# Altium PCB Beetech Metro Shield 1.2.PcbDoc
Units mm, origin at the board's own origin, x right, y up, seen from the top; angles counter-clockwise.
Board outline 68 x 53.53 mm, 2 copper layers (Top Layer, Bottom Layer), stack 1.671 mm thick; 26 components, 22 nets, 116 pads, 21 vias.
Unrouted connection lines stored in the file: 80.
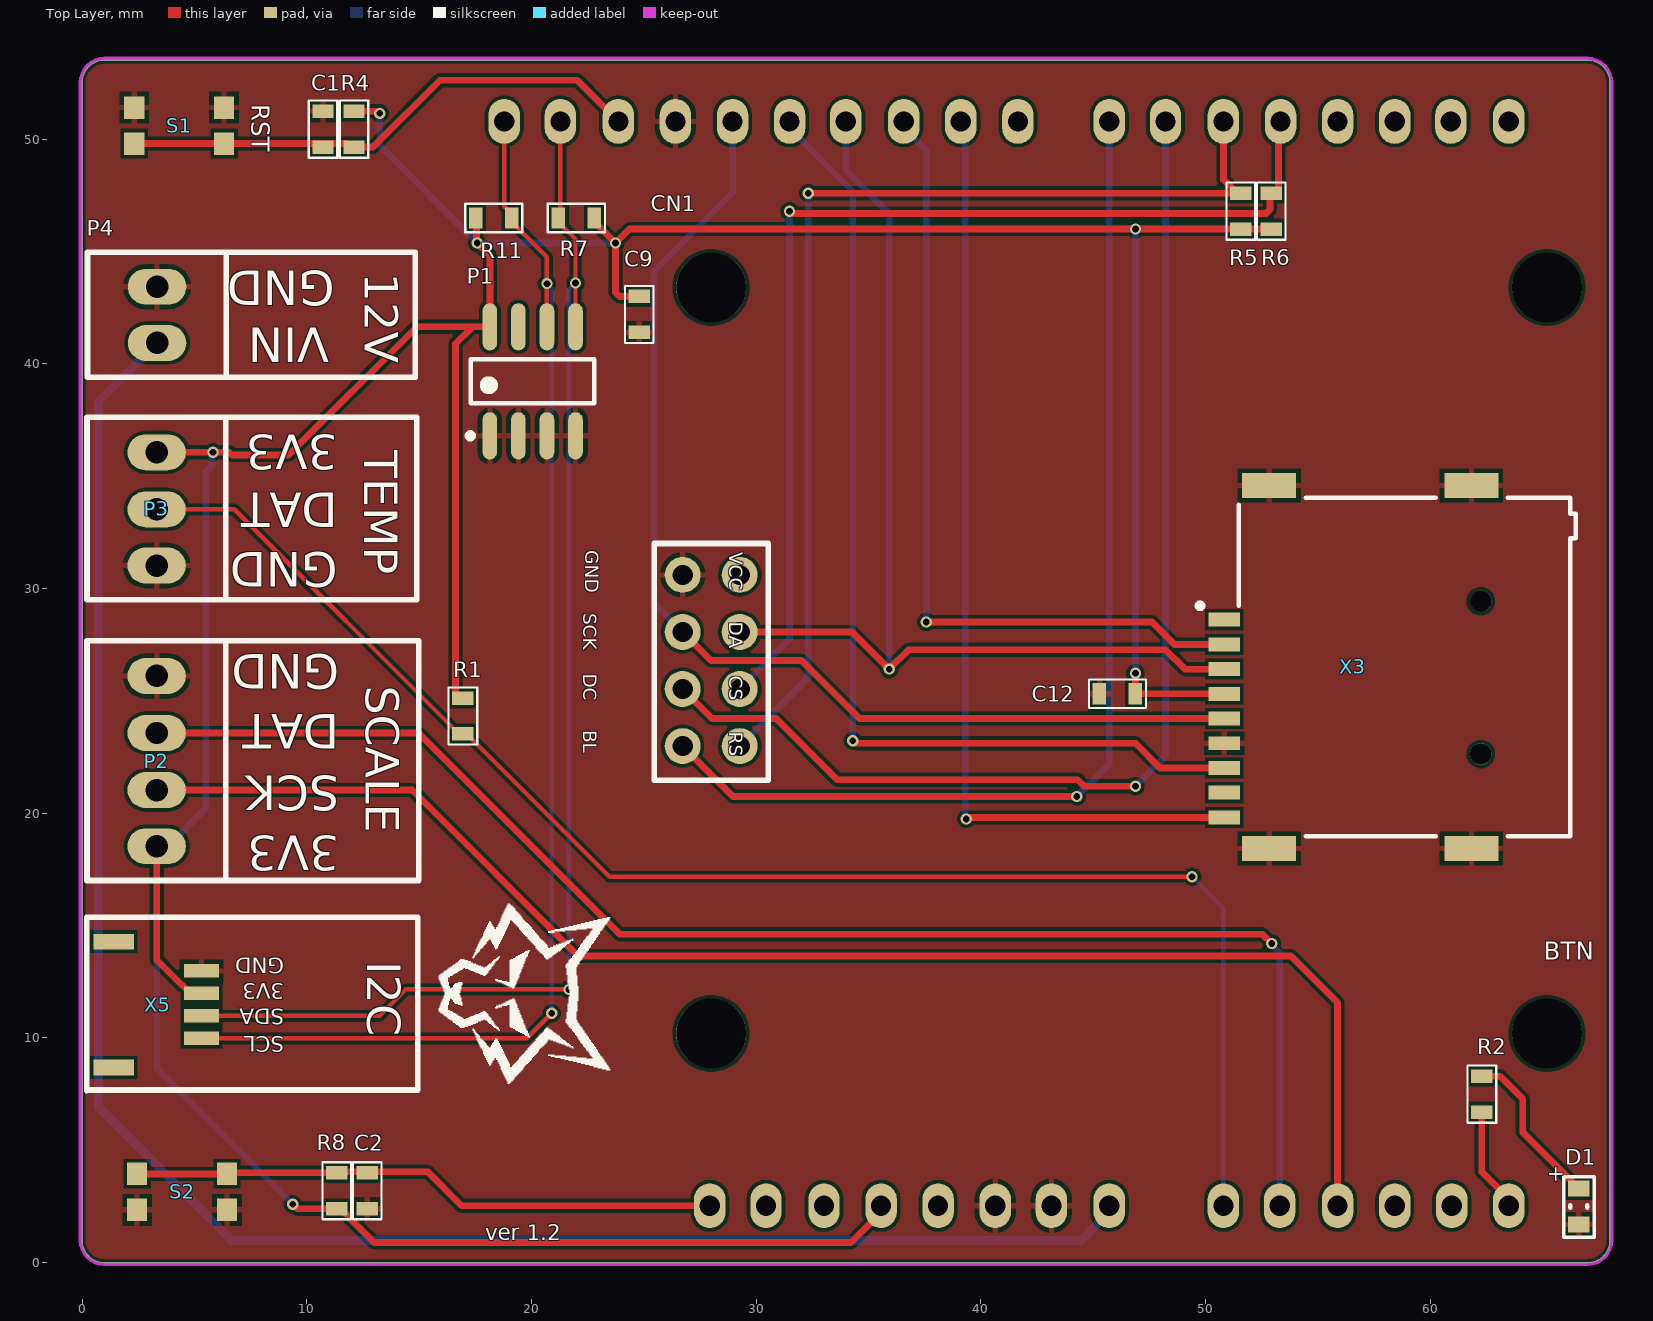
[diagram p0: Top Layer view]
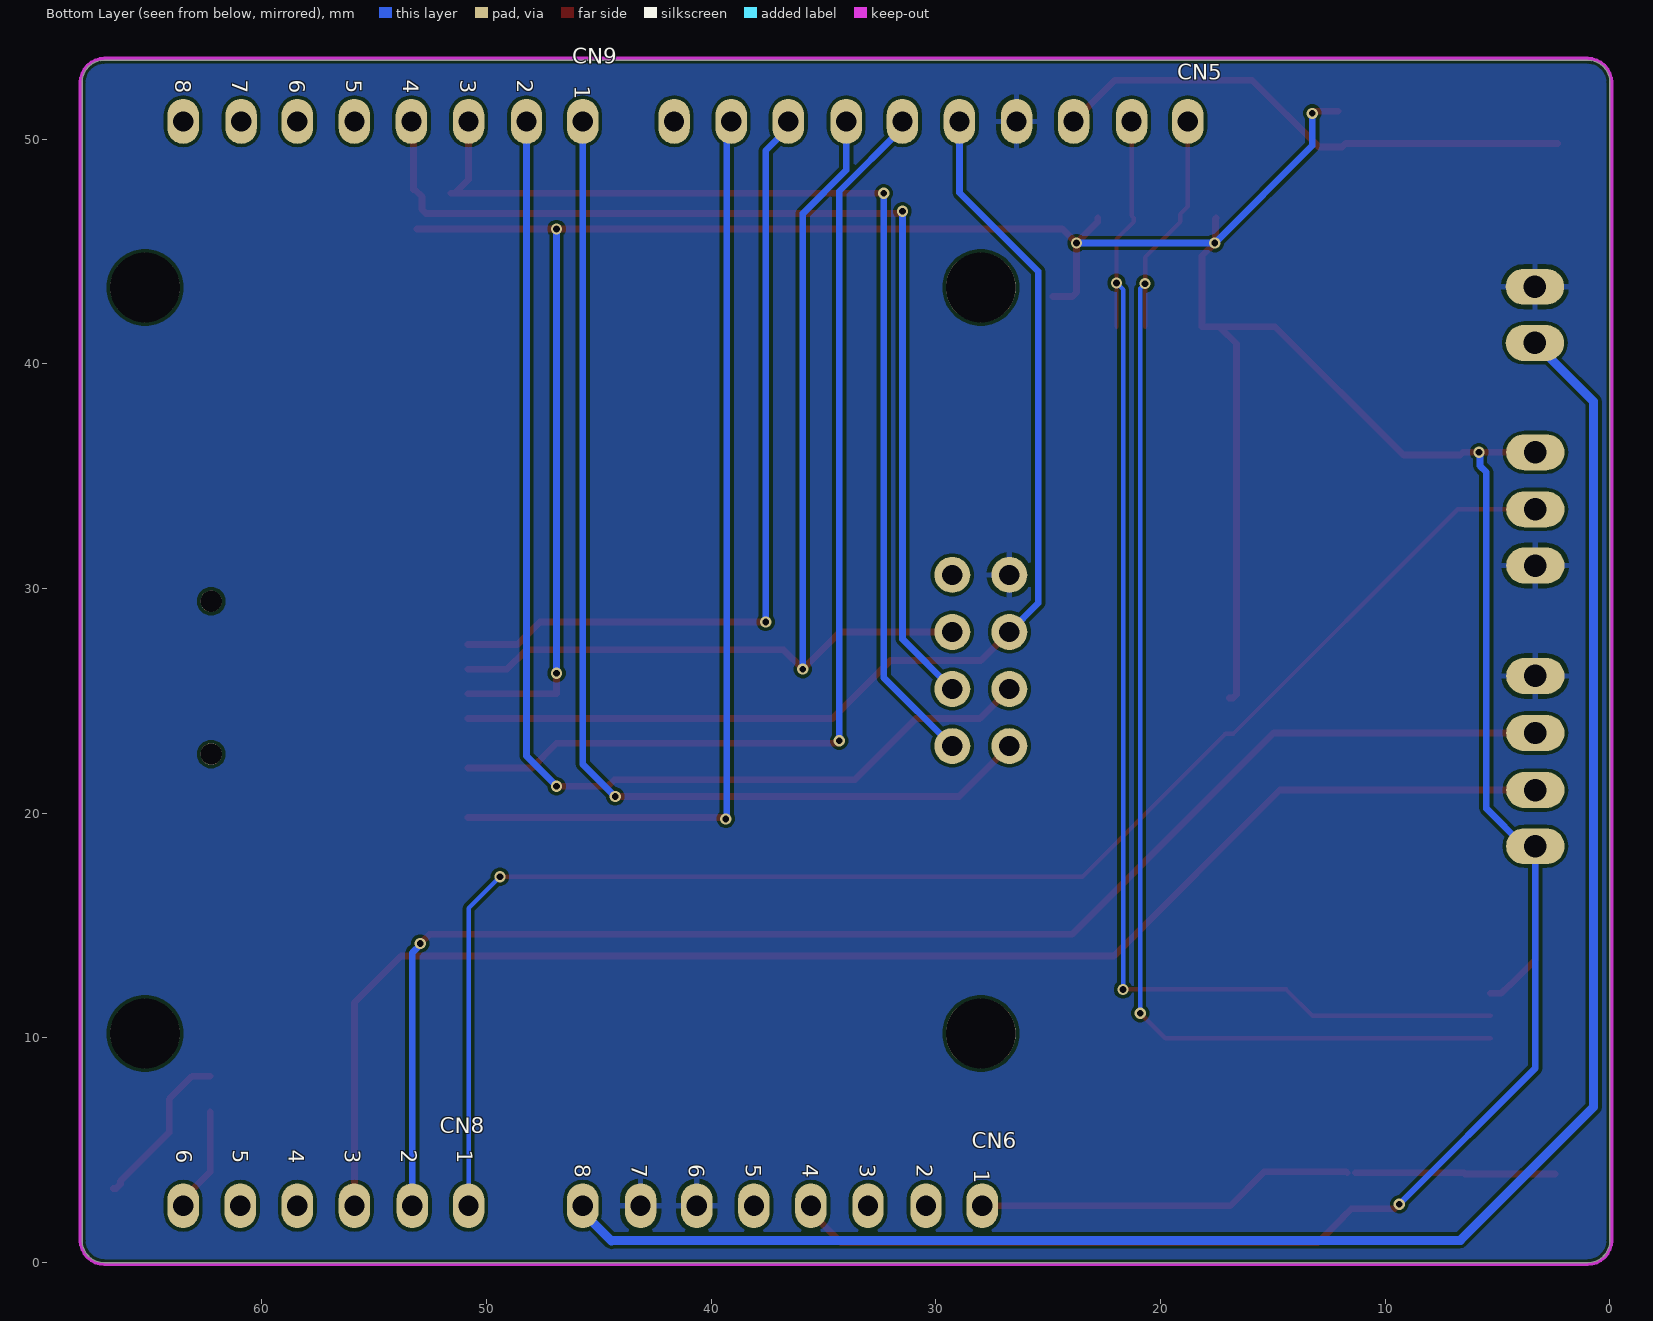
[diagram p1: Bottom Layer view, seen from below]
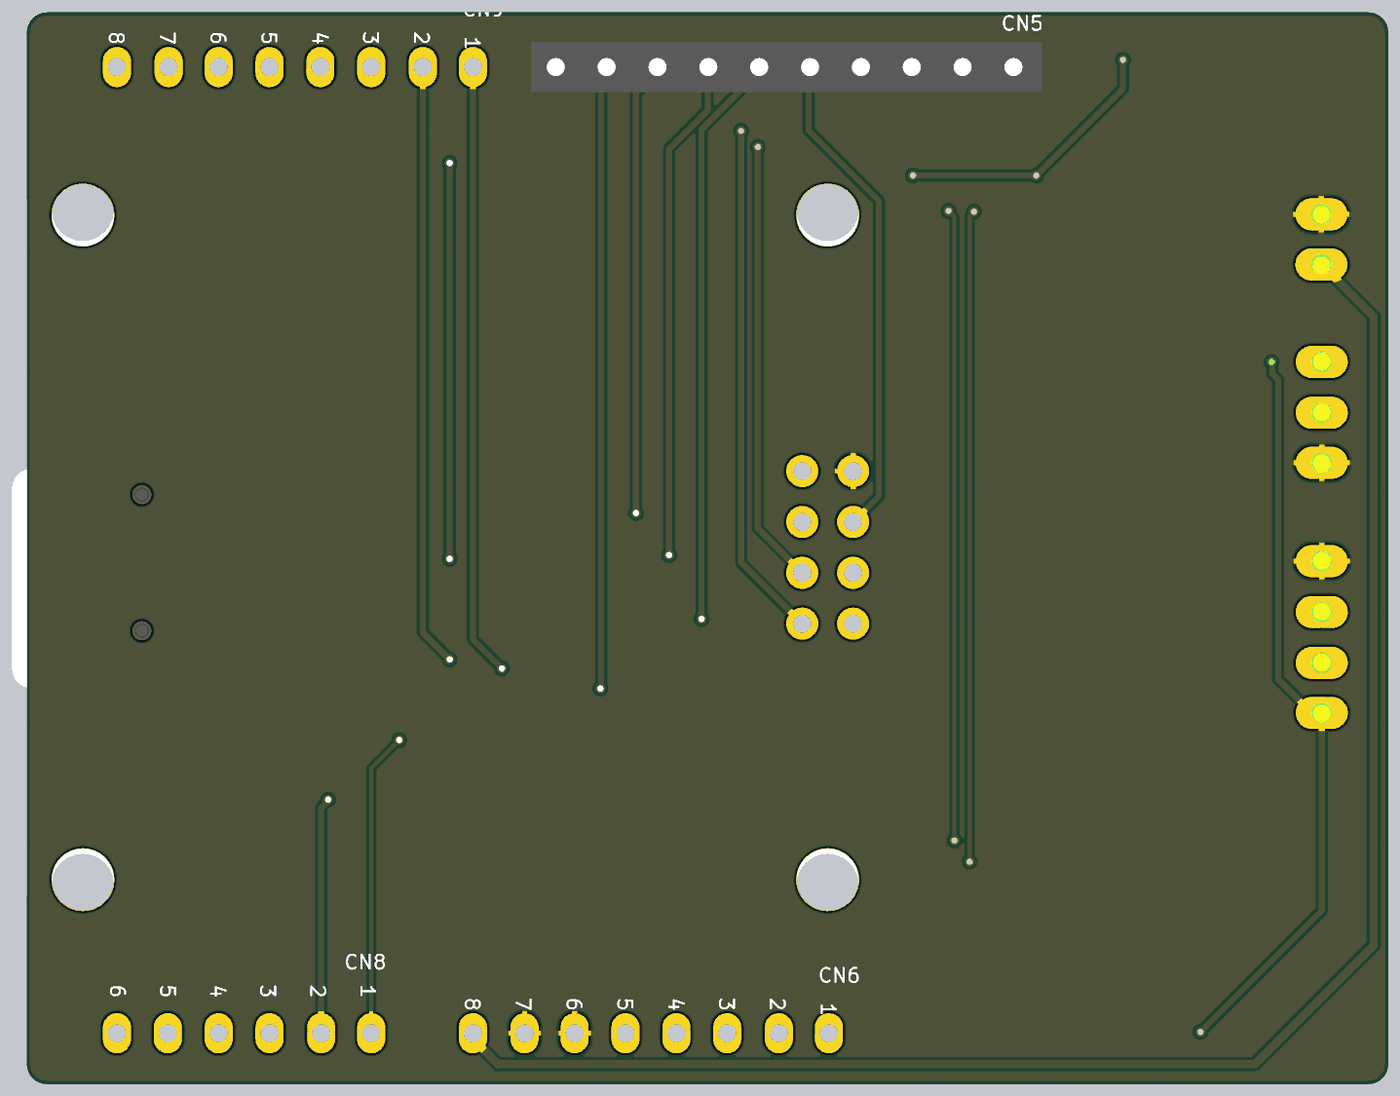
[diagram p2: 3D render of the assembled board from below, using the file's embedded part models]

## Layer stack, top to bottom
Top Solder: solder mask 0.0102, Solder Resist, Dk 3.5
Top Layer: signal copper 0.0356
Dielectric1: core 1.6, FR-4, Dk 4.8
Bottom Layer: signal copper 0.0356
Bottom Solder: solder mask 0.0102, Solder Resist, Dk 3.5

## Board outline
67,53.522 1,53.522 0.805,53.503 0.617,53.446 0.444,53.354 0.293,53.229 0.169,53.078 0.076,52.905 0.019,52.717 0,52.522 0,0.992 0.019,0.797 0.076,0.61 0.169,0.437 0.293,0.285 0.444,0.161 0.617,0.068 0.805,0.012 1,-0.008 67,-0.008 67.195,0.012 67.383,0.068 67.556,0.161 67.707,0.285 67.831,0.437 67.924,0.61 67.981,0.797 68,0.992 68,52.522 67.981,52.717 67.924,52.905 67.831,53.078 67.707,53.229 67.556,53.354 67.383,53.446 67.195,53.503

## Design rules (kind name [scope] priority, off if disabled: settings)
Clearance [All] p1: gap=0.15 ignorepadtopadclearanceinfootprint=FALSE
ComponentClearance [All] p1: gap=0 collisioncheckmode=3 verticalgap=0 showdistances=FALSE
FabricationTestPointUsage [All] p1 off: valid=0 allowmultiple=FALSE
FabricationTestpoint [All] p1 off: side=3 testpointundercomponent=TRUE minsize=1.016 maxsize=2.54 preferedsize=1.524 minholesize=0 maxholesize=1.016 preferedholesize=0.813 testpointgrid=0.025 allowsidetop=TRUE allowsidebottom=TRUE usegrid=TRUE gridtolerance=0
HoleSize [All] p1: absolutevalues=TRUE maxlimit=3.81 minlimit=0.025 maxpercent=80.000 minpercent=20.000
HoleToHoleClearance [All] p1: gap=0 allowstackedmicrovias=TRUE
MinimumSolderMaskSliver [All] p1: minsoldermaskwidth=0
PolygonConnect [InNet('VCC 3.3V')] p1: connectstyle=Direct reliefconductorwidth=0.254 reliefentries=4 polygonreliefangle="90 Angle" airgapwidth=0.254
PolygonConnect PolygonConnect_1 [InNet('GND')] p2: thpad.connectstyle=Relief thpad.reliefconductorwidth=0.254 thpad.reliefentries=4 thpad.polygonreliefangle="90 Angle" thpad.airgapwidth=0.2 smdpad.connectstyle=Relief smdpad.reliefconductorwidth=0.254 smdpad.reliefentries=4 smdpad.polygonreliefangle="90 Angle" smdpad.airgapwidth=0.2 via.connectstyle=Direct via.reliefconductorwidth=0.254 via.reliefentries=4 via.polygonreliefangle="90 Angle" via.airgapwidth=0.2
RoutingVias [All] p1: holewidth=0.3 width=0.5 viastyle="Through Hole" minholewidth=0.2 minwidth=0.4 maxholewidth=1.2 maxwidth=2 useviatemplates=TRUE viatemplateguid#1={3DB4D02C-F2AA-4D96-93EA-058B72C6274F} viatemplateguid#2={7253A52D-AA54-4A84-B513-F050F2263B0A} viatemplatename#1=v50h30m0mx0 viatemplatename#2=v50h30m50mx0
SilkToSilkClearance [All] p1: silktosilkclearance=0.152
SilkToSolderMaskClearance [IsPad] p1: minsilkscreentomaskgap=0 clearancetoexposedcopper=TRUE
SolderMaskExpansion [All] p1: expansion=0.102 istentingtop=FALSE
SupplyNets "Schematic Supply Nets_7" [InNet('VIN')] p1: voltage=0.000
SupplyNets "Schematic Supply Nets_5" [InNet('3V3')] p2: voltage=0.000
SupplyNets "Schematic Supply Nets" [InNet('GND')] p3: voltage=0.000
Width [All] p1: maxlimit=5.08 minlimit=0.01 preferedwidth=0.305 minimp=50.000000 maximp=50.000000 favimp=50.000000
22 further rules are at their usual default settings.

## Components (designator, comment, footprint, x,y, rotation, side; value= is the part's Value field where it differs from the comment)
C1 "100nF 0603" "CAP 0603 - OUTLINE" 10.725,50.45 r270 top value=100nF
C2 "100nF 0603" "CAP 0603 - OUTLINE" 12.696,3.2 r90 top value=100nF
C9 "10uF 0603" "CAP 0603 - OUTLINE" 24.8,42.2 r90 top value=10uF
C12 "10uF 0603" "CAP 0603 - OUTLINE" 46.082,25.315 r0 top value=10uF
CN1 "LCD 1.37 Zoll Matrix" "LCD 1.37 Zoll Matrix LCD-Modul SPI-Schnittstelle Treiber AiP31567 - ST7567" 28,26.8 r90 top locked
CN5 "10-Pin Stiftleiste 10x1 2.54 Low Profile" "10PIN - III" 18.79,50.792 r270 bottom locked
CN6 "8-Pin Stiftleiste 8x1 2.54 Low Profile" "8 PIN - Stiftleiste" 27.94,2.532 r270 bottom locked
CN8 "6-PiN" 6PIN 50.8,2.532 r270 bottom locked
CN9 "8-Pin Stiftleiste 8x1 2.54 Low Profile" "8 PIN - Stiftleiste" 45.72,50.792 r270 bottom locked
D1 "LED Diode SMD LOW CURRENT" "LED SMD 0603 FOOTPRINT" 66.611,2.5 r270 top
P1 "EEPROM CAT24C512WI-GT3" "SO 8Pin" 20.056,39.225 r90 top
P2 "4-Pin Right Angle Housing" "4PIN - RND 205-EK254-2.54-04P" 3.32,18.533 r180 top
P3 "3-Pin Right Angle Housing" "3PIN - RND 205-EK254-2.54-03P" 3.321,31.025 r180 top
P4 "2-Pin Right Angle Housing" "2PIN - RND 205-EK254-2.54-02P" 3.338,40.933 r180 top
R1 "4.7k Ohm 0603" "RES 0603 FOOTPRINT - OUTLINE" 16.948,24.329 r90 top value=4.7k
R2 "330 Ohm 0603" "RES 0603 FOOTPRINT - OUTLINE" 62.3,7.5 r270 top value=330
R4 "47k Ohm 0603" "RES 0603 FOOTPRINT - OUTLINE" 12.1,50.45 r270 top value=47k
R5 "47k Ohm 0603" "RES 0603 FOOTPRINT - OUTLINE" 51.575,46.8 r270 top value=47k
R6 "47k Ohm 0603" "RES 0603 FOOTPRINT - OUTLINE" 52.925,46.8 r270 top value=47k
R7 "10k Ohm 0603" "RES 0603 FOOTPRINT - OUTLINE" 22,46.493 r0 top value=10k
R8 "47k Ohm 0603" "RES 0603 FOOTPRINT - OUTLINE" 11.336,3.2 r90 top value=47k
R11 "10k Ohm 0603" "RES 0603 FOOTPRINT - OUTLINE" 18.325,46.493 r180 top value=10k
S1 "Taster Print_SMD_2" "Taster Print - SMD - KMR241G LFS" 4.319,50.606 r0 top
S2 "Taster Print_SMD_2" "Taster Print - SMD - KMR241G LFS" 4.45,3.15 r180 top
X3 "SD micro Card Holder_3" "SD CARD HOLDER - MICRO - 3 - SD CARD INSERTED" 62.255,26.035 r90 top locked
X5 "4-Pin" "QWIIC JST CONNECTOR - SMD 4-PIN" 5.314,11.484 r270 top

## Footprints (in the part's own frame and the unit in brackets; to place one, negate y for a bottom-side part, rotate by r counter-clockwise, add the part's x,y. Pads: shape width x height; smd on the part's side, far side on the other; paste and mask are expansions set on the pad)
"2PIN - RND 205-EK254-2.54-02P" [mm] "RND 205-EK254-2.54-02P"
  oval 2.6x1.6 hole 1: 1(0,0) 2(0,-2.5)
  silkscreen extent -3.07,-4.04 3.1,1.52, body extent -3.1,-3.99 3.1,1.55, height 8.51
"3PIN - RND 205-EK254-2.54-03P" [mm] "RND 205-EK254-2.54-03P"
  oval 2.6x1.6 hole 1: 1(0,0) 2(0,-2.5) 3(0,-5.04)
  silkscreen extent -3.07,-6.6 3.1,1.52, body extent -3.1,-6.55 3.1,1.53, height 8.51
"4PIN - RND 205-EK254-2.54-04P" [mm] "RND 205-EK254-2.54-04P"
  oval 2.6x1.6 hole 1: 1(0,0) 2(0,-2.5) 3(0,-5.04) 4(0,-7.58)
  silkscreen extent -3.07,-9.14 3.1,1.52, body extent -3.1,-9.1 3.1,1.52, height 8.51
6PIN [mm]
  oval 2x1.4 hole 0.9: 1(0,0) 2(0,-2.5) 3(0,-5.08) 4(0,-7.62) 5(0,-10.16) 6(0,-12.7)
"8 PIN - Stiftleiste" [mm] "2212S-08SG-85 -  Board-to-Board-Steckve61300811021 -  Board-to-Board-Steckverbinder, abgewinkelt, 2.54 mm, 8 Kontakt(e), Stiftleiste, Baureihe WR-PHD rbinder, 2.54 mm, 8 Kontakt(e), Buchse, Baureihe 2212S, Durchsteckmontage"
  oval 2x1.4 hole 0.9: 1(0,0) 2(0,-2.5) 3(0,-5.08) 4(0,-7.62) 5(0,-10.16) 6(0,-12.7) 7(0,-15.2) 8(0,-17.78)
  body extent -1.25,-18.99 1.25,1.51, height 8
"10PIN - III" [mm]
  oval 2x1.4 hole 0.9: 1(0,0) 2(0,-2.5) 3(0,-5.08) 4(0,-7.62) 5(0,-10.16) 6(0,-12.7) 7(0,-15.2) 8(0,-17.78) 9(0,-20.32) 10(0,-22.86)
  body extent -1.25,-24 1.25,1.5, height 8
"CAP 0603 - OUTLINE" [mm] "CAP 0603"
  rect 0.6x0.95 smd: 1(-0.8,0) 2(0.8,0)
  silkscreen extent -1.27,-0.64 1.27,0.64, body extent -0.8,-0.4 0.8,0.4, height 0.8
"LCD 1.37 Zoll Matrix LCD-Modul SPI-Schnittstelle Treiber AiP31567 - ST7567" [mm] "NC"
  round 1.6 hole 0.9: 1(-3.81,1.27) 2(-3.81,-1.27) 3(-1.27,1.27) 4(-1.27,-1.27) 5(1.27,1.27) 6(1.27,-1.27) 7(3.81,1.27) 8(3.81,-1.27)
  round 3.1 hole 3.1: 10(-16.6,0) 10(-16.6,-37.2) 10(16.6,0) 10(16.6,-37.2)
  silkscreen extent -5.33,-2.54 5.21,2.54, body extent -19.4,-40.01 19.4,2.79, height 10.2
"LED SMD 0603 FOOTPRINT" [mm] "Chip Diode, 2-Leads, Body 1.60x0.80mm, IPC Medium Density"
  rect 0.7x0.95 smd: 1(-0.8,0) 2(0.8,0)
  silkscreen extent -1.32,-0.66 1.37,0.69, body extent -0.8,-0.4 0.8,0.4, height 0.35
"QWIIC JST CONNECTOR - SMD 4-PIN" [mm] "QWIIC JST CONNECTOR - SMD 4-PIN"
  rect 0.7x1.8 smd: 0(-2.8,-3.9) 0(2.8,-3.9)
  rect 0.6x1.55 smd: 1(1.5,0) 2(0.5,0) 3(-0.5,0) 4(-1.5,0)
  body extent -3.03,-4.73 2.97,0.22, height 2.96
"RES 0603 FOOTPRINT - OUTLINE" [mm] "RES 0603 FOOTPRINT"
  rect 0.6x0.95 smd: 1(-0.8,0) 2(0.8,0)
  silkscreen extent -1.27,-0.64 1.27,0.64, body extent -0.8,-0.4 0.8,0.4, height 0.8
"SD CARD HOLDER - MICRO - 3 - SD CARD INSERTED" [mm] "micro SD Card holder, Molex Part Number:    / MEM2075-00-140-01-A"
  rect 0.62x1.4 smd: 1(2.58,11.42) 2(1.48,11.42) 3(0.38,11.42) 4(-0.72,11.42) 5(-1.82,11.42) 6(-2.92,11.42) 7(-4.02,11.42) 8(-5.12,11.42) 10(-6.22,11.42)
  rect 1.1x2.4 smd: 20(-7.6,0.42) 20(-7.6,9.42) 20(8.55,0.42) 20(8.55,9.42)
  round 0.95 hole 0.95 unplated: ""(-3.4,0) ""(3.4,0)
  silkscreen extent -7.05,-4.23 8,12.62, body extent -7.74,-6.5 8.7,11.6, height 1.46
"SO 8Pin" [mm] "SOIC, 8-Leads, Body 5,50x3,90mm, Pitch 1,27mm, IPC Medium Density"
  oval 2.1x0.65 smd: 1(-2.425,1.905) 2(-2.425,0.635) 3(-2.425,-0.635) 4(-2.425,-1.905) 5(2.425,-1.905) 6(2.425,-0.635) 7(2.425,0.635) 8(2.425,1.905)
  silkscreen extent -2.55,-2.75 0.98,2.9, body extent -1.95,-2.75 1.95,2.75, height 1.55
"Taster Print - SMD - KMR241G LFS" [mm] "http://ch.farnell.com/c-k-components/kmr241g-lfs/taster-smd-4n/dp/1437637"
  rect 0.9x1 smd: 1(-2,0.8) 2(-2,-0.8) 10(2,0.8) 20(2,-0.8)
  body extent -2.3,-1.4 2.3,1.4, height 1.93

## Part data
C1 C2 C9 C12: "C CERAMIC SMD", Bezeichnung="C SMD", Haendler=Mouser, housing/footprint=0603, Umax=10V
  C1 C2: Haendler Nr=710-885012206020, Hersteller=Würth, Hersteller Nr=885012206020, Preis (CHF)=0.05
  C9 C12: Dielektrikum=X5R, Haendler Nr=810-C1608X5R1A106K, Hersteller=TDK, Hersteller Nr=C1608X5R1A106K080AC, Preis (CHF)=0.5
CN1: "1,37 Zoll 1,37 Zoll Matrix LCD-Modul SPI-Schnittstelle AiP31567 Treiber Gleiche wie ST7567", Haendler=Mouser, Hersteller="WeAct Studio", Hersteller Nr=12864, link=https://de.aliexpress.com/item/1005009572573845.html?gatewayAdapt=glo2deu, Preis (CHF)=1.8
CN5: "Low Profile 10-Pin Stiftleiste 10x1 2.54 Low Profile", Haendler=Mouser, Haendler Nr=200-TLW11006GS, Hersteller=Samtec, Hersteller Nr=TLW-110-06-G-S, Preis (CHF)=2.2
CN6 CN9: "Low Profile 8-Pin Stiftleiste 8x1 2.54", Haendler=Mouser, Haendler2=Farnell, Haendler2 Nr=2856894, Haendler Nr=200-TLW10806TS, link=https://www.mouser.ch/Connectors/Headers-Wire-Housings/_/N-ay0lo?P=1ytkls2&Keyword=tlw-108&FS=True, Preis (CHF)=1.06
CN8: "6-Pin", LatestRevisionDate=17-Jul-2002, LatestRevisionNote="Re-released for DXP Platform.", Publisher="Altium Limited"
D1: library part "LED Diode SMD - GREEN - 0603 - 2mA_1", "LED Green APT1608LZGCK", COLOR=GREEN, Forward Voltage=2.65, Haendler=Mouser, Haendler Nr=604-APT1608LZGCK, Hersteller=Knightbright, Hersteller Nr=APT1608LZGCK, If=2mA, link=http://ch.farnell.com/kingbright/kpt-1608lvzgck/led-gr-n-50mcd-525nm-smd/dp/2610409, Preis (CHF)=0.321
P2: library part "4-Pin Screw Terminal", "4-Pin", ComponentLink1Description=Mouser, ComponentLink1URL=https://www.mouser.ch/ProductDetail/TE-Connectivity/640453-2?qs=sGAEpiMZZMs%252bGHln7q6pm5E1Eb6qwPl2KIU5TYv3tVY%3d, Haendler=Distrelec, Haendler Nr=301-27-920, Hersteller=RND, Hersteller Nr="RND 205-EK254-2.54-04P", Preis (CHF)=0.60
P3: library part "3-Pin Screw Terminal", "3-Pin", ComponentLink1Description=Mouser, ComponentLink1URL=https://www.mouser.ch/ProductDetail/TE-Connectivity/640453-2?qs=sGAEpiMZZMs%252bGHln7q6pm5E1Eb6qwPl2KIU5TYv3tVY%3d, Haendler=Distrelec, Haendler Nr=301-27-919, Preis (CHF)=0.60
P4: library part "2-Pin Screw Terminal", "2-Pin", ComponentLink1Description=Mouser, ComponentLink1URL=https://www.mouser.ch/ProductDetail/TE-Connectivity/640453-2?qs=sGAEpiMZZMs%252bGHln7q6pm5E1Eb6qwPl2KIU5TYv3tVY%3d, Haendler=Distrelec, Haendler Nr=301-27-918, Hersteller="RND 205-EK254-2.54-02P", Preis (CHF)=0.60
R1 R2 R4 R5 R6 R7 R8 R11: "R SMD", Bezeichnung="R SMD", Haendler=Mouser, housing/footprint=0603, Preis (CHF)=0.01
  R1: Haendler Nr=755-ESR03EZPF4701
  R2: Haendler Nr=603-RC0603FR-07330RL, Hersteller=YAGEO, Hersteller Nr=RC0603FR-07330RL
  R4 R5 R6 R8: Haendler Nr=603-AC0603FR-0747KL, Hersteller=Yageo, Hersteller Nr=AC0603FR-0747KL
  R7 R11: Haendler Nr=603-AC0603FR-0710KL, Hersteller=Yageo, Hersteller Nr=AC0603FR-0710KL
S1 S2: "Taster", Haendler=Mouser, Haendler2=Farnell, Haendler2 Nr=1437637, Haendler Nr=611-KMR241GLFS, Hersteller=C&K, Hersteller Nr="KMR241G LFS", link=http://ch.farnell.com/c-k-components/kmr241g-lfs/taster-smd-4n/dp/1437637, Link Hersteller=http://www.ckswitches.com/products/switches/product-details/Tactile/KMR2/KMR241NGLFS/, Preis (CHF)=0.5
X3: "SD micro Card  Holder", Haendler=Mouser, Haendler2=Digikey, Haendler2 Nr=2073-MEM2075-00-140-01-ATR-ND, Haendler Nr=640-MEM20750014001A, Hersteller=GCT, Hersteller Nr=MEM2075-00-140-01-A, Preis (CHF)=1.6
X5: library part "4-Pin QWIIC JST CONNECTOR - SMD 4_1", "QWIIC JST CONNECTOR - SMD 4-PIN", Haendler=Mouser, Haendler2=Digikey, Haendler2 Nr=455-SM04B-SRSS-TBCT-ND, Haendler2 Nr 2=455-SM04B-SRSS-TBCT-ND, Haendler Nr=306-SM04BSRSSTBLFSN, Hersteller=Molex, Hersteller Nr=SM04B-SRSS-TB, link=https://cdn-learn.adafruit.com/downloads/pdf/introducing-adafruit-stemma-qt.pdf?timestamp=1629187570, Preis (CHF)=0.5
P1: Datasheet=http://ch.farnell.com/on-semiconductor/cat24c32wi-gt3/eeprom-32kbit-serial-400khz-soic/dp/1718129, Haendler=Mouser, Haendler Nr=863-CAT24C512WI-GT3, Hersteller="ON SEMICONDUCTOR", Hersteller Nr=CAT24C512WI-GT3, Preis (CHF)=0.8

## Via types
v1: diameter 0.5, hole 0.3, Top Layer to Bottom Layer, tented both sides, 21 vias

## Nets (pads, with @x,y where several pads share a name; then routed paths per layer and width w, separated by ;. In a path a pad name is that pad's centre, name@x,y a point inside that pad or via, vN(x,y) a via of type N, cw(c..) or ccw(c..) an arc to the next point about the centre after c; other vN are vias at no path point)
3V3: C9.2 C12.2 CN6.4 P1.8 P2.1 P3.3 R1.2 R4.1 R5.2 R6.2 R7.2 R8.1 R11.2 X3.4 X5.3 | length 186.2
  Top Layer w0.3: P2.1 3.32,13.479 4.451,12.348 4.476,12.348 4.839,11.984 X5.3 ; P3.3 v1(5.825,36.065) 6.55,36.065 6.675,35.94 9.188,35.94 14.897,41.65 17.376,41.65 ; v1(9.375,2.6) 9.575,2.4 R8.1 11.511,2.4 11.884,2.026 11.884,2.012 13.001,0.895 34.222,0.895 35.56,2.232 CN6.4 ; R4.1 13.096,51.25 13.196,51.15 v1(13.25,51.15) ; R1.2 16.773,25.129 16.623,25.279 16.623,40.897 17.376,41.65 ; R11.2 17.554,46.464 17.554,45.408 v1(17.583,45.379) 18.151,44.812 P1.8 17.376,41.65 ; R7.2 22.8,46.318 v1(23.739,45.379) ; C9.2 23.915,43 23.739,43.176 v1(23.739,45.379) ; v1(46.882,26.231) C12.2 X3.4 ; R6.2@53.1,46 R6.2 R5.2 v1(46.882,46) 24.36,46 v1(23.739,45.379)
  Bottom Layer w0.3: v1(5.825,36.065) 5.787,36.027 5.787,35.463 5.5,35.176 5.5,20.212 3.82,18.533 P2.1 3.32,8.655 v1(9.375,2.6) ; v1(13.25,51.15) 13.25,49.713 v1(17.583,45.379) v1(23.739,45.379) ; v1(46.882,26.231) v1(46.882,46)
BL: CN1.1 CN9.1 | length 49.1
  Top Layer w0.3: CN1.1 28.97,20.75 v1(44.275,20.75)
  Bottom Layer w0.3: v1(44.275,20.75) 45.72,22.195 CN9.1
BUTTON: C2.2 CN6.1 R8.2 S2.2 S2.20 | length 25.8
  Top Layer w0.3: S2.20 S2.2 6.5,4 R8.2 ; R8.2@11.693,4 11.743,4.05 15.375,4.05 16.893,2.532 CN6.1
"CARD DETECT": CN5.9 X3.10 | length 42.7
  Top Layer w0.3: v1(39.35,19.75) 39.425,19.75 39.49,19.815 X3.10
  Bottom Layer w0.3: CN5.9 39.312,50.591 39.312,19.788 v1(39.35,19.75)
D/C: CN1.3 CN9.2 | length 52.1
  Top Layer w0.3: CN1.3 28.045,24.215 30.889,24.215 33.614,21.49 44.313,21.49 44.597,21.206 v1(46.882,21.206)
  Bottom Layer w0.3: v1(46.882,21.206) 48.22,22.544 CN9.2
DAT_SCALE: CN8.2 P2.3 | length 65.3
  Top Layer w0.3: P2.3 14.977,23.573 23.939,14.611 52.539,14.611 v1(52.95,14.2)
  Bottom Layer w0.3: v1(52.95,14.2) 52.95,14.146 53.3,13.796 CN8.2
DAT_TEMP: CN8.1 P3.2 R1.1 | length 68.1
  Top Layer w0.2: P3.2 6.777,33.525 16.773,23.529 17.123,23.529 23.478,17.175 v1(49.4,17.175)
  Bottom Layer w0.2: v1(49.4,17.175) 50.8,15.775 CN8.1
"ESP32 RESET": C1.2 CN5.3 R4.2 S1.2 S1.20 | length 23.6
  Top Layer w0.3: S1.2 S1.20 11.769,49.806 11.925,49.65 R4.2 12.95,49.65 15.92,52.62 22.042,52.62 23.36,51.303 23.362,51.303 23.87,50.795 CN5.3
GND: C1.1 C2.1 C9.1 C12.1 CN1.7 CN5.4 CN6.6 CN6.7 D1.2 P1.1 P1.2 P1.3 P1.4 P2.4 P3.1 P4.2 S1.1 S1.10 S2.1 S2.10 X3.6 X3.20 X5.4
"LCD CS": CN1.4 CN9.4 R6.1 | length 47.8
  Top Layer w0.3: v1(31.49,46.798) 31.544,46.798 31.646,46.697 52.7,46.697 52.875,46.872 52.875,47.45 53.175,47.75 53.25,47.75 53.25,50.702 CN9.4
  Bottom Layer w0.3: CN1.4 31.49,27.75 v1(31.49,46.798)
"LED 1 G": CN8.6 R2.2 | length 4.7
  Top Layer w0.3: R2.2 62.3,4.032 63.5,2.832 CN8.6
NetD1_1: D1.1 R2.1 | length 7.3
  Top Layer w0.3: R2.1 63.1,8.3 64.125,7.275 64.125,5.786 66.286,3.625 66.286,3.5 66.486,3.3 D1.1
RES: CN1.2 CN9.3 R5.1 | length 48.6
  Top Layer w0.3: v1(32.325,47.6) R5.1@51.4,47.6 ; CN9.3 50.8,48.2 R5.1@51.4,47.6 ; R5.1 R5.1@51.4,47.6
  Bottom Layer w0.3: CN1.2 32.325,26.045 v1(32.325,47.6)
"SCK SCALE": CN8.3 P2.2 | length 65.5
  Top Layer w0.3: P2.2 14.696,21.033 22.079,13.65 53.8,13.65 55.88,11.57 CN8.3
SCL: CN5.1 P1.6 R11.1 X5.1 | length 58.5
  Top Layer w0.2: X5.1 19.791,9.984 v1(20.908,11.101) ; CN5.1 18.79,47.004 19.125,46.668 R11.1 19.125,46.318 20.691,44.753 v1(20.691,43.572) P1.6
  Bottom Layer w0.2: v1(20.691,43.572) 20.908,43.356 v1(20.908,11.101)
"SD CS": CN5.8 X3.2 | length 36.4
  Top Layer w0.3: v1(37.575,28.515) 47.616,28.515 48.616,27.515 X3.2
  Bottom Layer w0.3: CN5.8 36.57,50.492 37.575,49.487 v1(37.575,28.515)
SDA: CN5.2 P1.5 R7.1 X5.2 | length 57.9
  Top Layer w0.2: X5.2 13.24,10.984 14.416,12.16 v1(21.667,12.16) ; CN5.2 21.29,46.583 R7.1 21.2,46.318 21.961,45.557 v1(21.961,43.604) P1.5
  Bottom Layer w0.2: v1(21.667,12.16) 21.667,43.31 v1(21.961,43.604)
"SPI MISO": CN5.6 X3.7 | length 45.8
  Top Layer w0.3: v1(34.3,23.225) 34.41,23.115 46.882,23.115 47.982,22.015 X3.7
  Bottom Layer w0.3: CN5.6 31.49,50.492 34.3,47.682 v1(34.3,23.225)
"SPI MOSI": CN1.6 CN5.7 X3.3 | length 48.1
  Top Layer w0.3: CN1.6 34.267,28.07 v1(35.922,26.415) 36.782,27.275 48.22,27.275 49.08,26.415 X3.3
  Bottom Layer w0.3: CN5.7 33.99,48.629 35.922,46.697 v1(35.922,26.415)
"SPI SCK": CN1.5 CN5.5 X3.5 | length 50.4
  Top Layer w0.3: CN1.5 28,26.8 32.017,26.8 34.602,24.215 X3.5
  Bottom Layer w0.3: CN1.5 25.445,29.355 25.445,44.111 28.95,47.616 CN5.5
VCC: CN1.8
VIN: CN6.8 P4.1 | length 83.5
  Bottom Layer w0.4: P4.1 3.162,40.933 2.608,40.379 2.608,40.204 0.725,38.32 0.725,6.929 6.659,0.995 44.399,0.995 44.431,0.963 45.72,2.252 CN6.8
pads on no net: CN1.10 CN5.10 CN6.2 CN6.3 CN6.5 CN8.4 CN8.5 CN9.5 CN9.6 CN9.7 CN9.8 P1.7 X3. X3.1 X3.8 X5.0

## Polygon pours and split planes (outlines as drawn)
GND on Top Layer "GND_L01_P000" (solid, pour order 0): 67,53.522 1,53.522 0.805,53.503 0.617,53.446 0.444,53.354 0.293,53.229 0.169,53.078 0.076,52.905 0.019,52.717 0,52.522 0,0.992 0.019,0.797 0.076,0.61 0.169,0.437 0.293,0.285 0.444,0.161 0.617,0.068 0.805,0.012 1,-0.008 67,-0.008 67.195,0.012 67.383,0.068 67.556,0.161 67.707,0.285 67.831,0.437 67.924,0.61 67.981,0.797 68,0.992 68,52.522 67.981,52.717 67.924,52.905 67.831,53.078 67.707,53.229 67.556,53.354 67.383,53.446 67.195,53.503
GND on Bottom Layer "GND_L02_P001" (solid, pour order 1): 67,53.522 1,53.522 0.805,53.503 0.617,53.446 0.444,53.354 0.293,53.229 0.169,53.078 0.076,52.905 0.019,52.717 0,52.522 0,0.992 0.019,0.797 0.076,0.61 0.169,0.437 0.293,0.285 0.444,0.161 0.617,0.068 0.805,0.012 1,-0.008 67,-0.008 67.195,0.012 67.383,0.068 67.556,0.161 67.707,0.285 67.831,0.437 67.924,0.61 67.981,0.797 68,0.992 68,52.522 67.981,52.717 67.924,52.905 67.831,53.078 67.707,53.229 67.556,53.354 67.383,53.446 67.195,53.503

## Keep-outs
Keep-Out Layer:
  lines w0.15: -0.075,0.985 cw(c0,0.992) -0.075,0.992 ; -0.075,0.985 cw(c0,0.992) -0.075,0.992 ; -0.075,0.985 -0.055,0.79 ; -0.075,0.992 -0.075,52.522 ; -0.075,52.522 cw(c0,52.522) -0.075,52.53 ; -0.075,52.522 cw(c0,52.522) -0.075,52.53 ; -0.075,52.53 -0.055,52.725 ; -0.055,0.79 ccw(c0.019,0.797) -0.053,0.776 ; -0.055,0.79 ccw(c0.019,0.797) -0.053,0.775 ; -0.055,52.725 cw(c0.019,52.717) -0.053,52.739 ; -0.055,52.725 cw(c0.019,52.717) -0.053,52.739 ; -0.053,0.775 cw(c0.019,0.797) -0.053,0.776 ; -0.053,0.775 -0.053,0.775 ; -0.053,0.775 0.004,0.588 ; -0.053,0.776 -0.053,0.775 ; -0.053,52.739 ccw(c0.019,52.717) -0.053,52.739 ; -0.053,52.739 0.004,52.927 ; -0.053,52.739 -0.053,52.739 ; -0.053,52.739 -0.053,52.739 ; 0.004,0.588 ccw(c0.076,0.61) 0.004,0.588 ; 0.004,0.588 ccw(c0.076,0.61) 0.01,0.574 ; 0.004,0.588 0.004,0.588 ; 0.004,0.588 0.004,0.588 ; 0.004,52.927 cw(c0.076,52.905) 0.004,52.927 ; 0.004,52.927 0.004,52.927 ; 0.004,52.927 cw(c0.076,52.905) 0.01,52.94 ; 0.004,52.927 0.004,52.927 ; 0.004,0.588 ccw(c0.076,0.61) 0.01,0.574 ; 0.004,52.927 cw(c0.076,52.905) 0.01,52.94 ; 0.01,0.574 ccw(c0.076,0.61) 0.01,0.574 ; 0.01,0.574 0.01,0.574 ; 0.01,0.574 0.01,0.574 ; 0.01,0.574 0.102,0.402 ; 0.01,52.941 ccw(c0.076,52.905) 0.01,52.94 ; 0.01,52.941 0.102,53.113 ; 0.01,52.94 0.01,52.941 ; 0.01,52.94 0.01,52.94 ; 0.102,0.401 ccw(c0.169,0.437) 0.111,0.389 ; 0.102,0.402 ccw(c0.169,0.437) 0.102,0.401 ; 0.102,0.401 ccw(c0.169,0.437) 0.111,0.389 ; 0.102,0.402 0.102,0.401 ; 0.102,0.401 0.102,0.401 ; 0.102,53.113 cw(c0.169,53.078) 0.111,53.125 ; 0.102,53.113 cw(c0.169,53.078) 0.102,53.113 ; 0.102,53.113 0.102,53.113 ; 0.102,53.113 0.102,53.113 ; 0.102,53.113 cw(c0.169,53.078) 0.111,53.125 ; 0.111,0.389 0.235,0.238 ; 0.111,53.125 0.235,53.277 ; 0.235,0.238 ccw(c0.293,0.285) 0.245,0.227 ; 0.235,0.238 ccw(c0.293,0.285) 0.245,0.227 ; 0.235,53.277 cw(c0.293,53.229) 0.245,53.287 ; 0.235,53.277 cw(c0.293,53.229) 0.245,53.287 ; 0.245,0.227 0.397,0.103 ; 0.245,53.287 0.397,53.412 ; 0.397,0.103 ccw(c0.444,0.161) 0.409,0.095 ; 0.397,0.103 ccw(c0.444,0.161) 0.409,0.095 ; 0.397,53.412 cw(c0.444,53.354) 0.409,53.42 ; 0.397,53.412 cw(c0.444,53.354) 0.409,53.42 ; 0.409,0.095 cw(c0.444,0.161) 0.409,0.095 ; 0.409,0.095 0.582,0.002 ; 0.409,0.095 0.409,0.095 ; 0.409,0.095 0.409,0.095 ; 0.409,53.42 ccw(c0.444,53.354) 0.409,53.42 ; 0.409,53.42 0.582,53.512 ; 0.409,53.42 0.409,53.42 ; 0.409,53.42 0.409,53.42 ; 0.582,0.002 ccw(c0.617,0.068) 0.596,-0.003 ; 0.582,0.002 ccw(c0.617,0.068) 0.582,0.002 ; 0.582,0.002 ccw(c0.617,0.068) 0.595,-0.003 ; 0.582,0.002 0.582,0.002 ; 0.582,0.002 0.582,0.002 ; 0.582,53.512 cw(c0.617,53.446) 0.595,53.518 ; 0.582,53.512 ccw(c0.617,53.446) 0.582,53.512 ; 0.582,53.512 cw(c0.617,53.446) 0.596,53.518 ; 0.582,53.512 0.582,53.512 ; 0.582,53.512 0.582,53.512 ; 0.595,-0.003 ccw(c0.617,0.068) 0.596,-0.003 ; 0.596,-0.003 0.783,-0.06 ; 0.596,-0.003 0.596,-0.003 ; 0.595,-0.003 0.596,-0.003 ; 0.596,53.518 ccw(c0.617,53.446) 0.595,53.518 ; 0.596,53.518 0.783,53.575 ; 0.596,53.518 0.596,53.518 ; 0.595,53.518 0.596,53.518 ; 0.783,-0.06 ccw(c0.805,0.012) 0.798,-0.063 ; 0.783,-0.06 ccw(c0.805,0.012) 0.783,-0.06 ; 0.783,-0.06 ccw(c0.805,0.012) 0.798,-0.063 ; 0.783,-0.06 0.783,-0.06 ; 0.783,-0.06 0.783,-0.06 ; 0.783,53.575 cw(c0.805,53.503) 0.798,53.578 ; 0.783,53.575 ccw(c0.805,53.503) 0.783,53.575 ; 0.783,53.575 cw(c0.805,53.503) 0.798,53.578 ; 0.783,53.575 0.783,53.575 ; 0.783,53.575 0.783,53.575 ; 0.798,-0.063 0.993,-0.082 ; 0.798,53.578 0.993,53.597 ; 0.993,-0.082 ccw(c1,-0.008) 1,-0.083 ; 0.993,-0.082 ccw(c1,-0.008) 1,-0.083 ; 0.993,53.597 cw(c1,53.522) 1,53.597 ; 0.993,53.597 cw(c1,53.522) 1,53.597 ; 1,-0.083 67,-0.083 ; 1,53.597 67,53.597 ; 67,-0.083 ccw(c67,-0.008) 67.007,-0.082 ; 67,-0.083 ccw(c67,-0.008) 67.007,-0.082 ; 67,53.597 cw(c67,53.522) 67.007,53.597 ; 67,53.597 cw(c67,53.522) 67.007,53.597 ; 67.007,-0.082 67.202,-0.063 ; 67.007,53.597 67.202,53.578 ; 67.202,-0.063 ccw(c67.195,0.012) 67.217,-0.06 ; 67.202,-0.063 ccw(c67.195,0.012) 67.217,-0.06 ; 67.202,53.578 cw(c67.195,53.503) 67.217,53.575 ; 67.202,53.578 cw(c67.195,53.503) 67.217,53.575 ; 67.217,-0.06 ccw(c67.195,0.012) 67.217,-0.06 ; 67.217,-0.06 67.404,-0.003 ; 67.217,-0.06 67.217,-0.06 ; 67.217,-0.06 67.217,-0.06 ; 67.217,53.575 ccw(c67.195,53.503) 67.217,53.575 ; 67.217,53.575 67.404,53.518 ; 67.217,53.575 67.217,53.575 ; 67.217,53.575 67.217,53.575 ; 67.404,-0.003 ccw(c67.383,0.068) 67.405,-0.003 ; 67.404,-0.003 ccw(c67.383,0.068) 67.418,0.002 ; 67.404,-0.003 67.405,-0.003 ; 67.404,-0.003 67.404,-0.003 ; 67.404,53.518 cw(c67.383,53.446) 67.418,53.512 ; 67.404,53.518 cw(c67.383,53.446) 67.405,53.518 ; 67.404,53.518 67.405,53.518 ; 67.404,53.518 67.404,53.518 ; 67.405,-0.003 ccw(c67.383,0.068) 67.418,0.002 ; 67.405,53.518 cw(c67.383,53.446) 67.418,53.512 ; 67.418,0.002 ccw(c67.383,0.068) 67.418,0.002 ; 67.418,0.002 67.591,0.095 ; 67.418,0.002 67.418,0.002 ; 67.418,0.002 67.418,0.002 ; 67.418,53.512 ccw(c67.383,53.446) 67.418,53.512 ; 67.418,53.512 67.591,53.42 ; 67.418,53.512 67.418,53.512 ; 67.418,53.512 67.418,53.512 ; 67.591,0.095 ccw(c67.556,0.161) 67.591,0.095 ; 67.591,0.095 67.591,0.095 ; 67.591,0.095 ccw(c67.556,0.161) 67.603,0.103 ; 67.591,0.095 ccw(c67.556,0.161) 67.603,0.103 ; 67.591,0.095 67.591,0.095 ; 67.591,53.42 cw(c67.556,53.354) 67.603,53.412 ; 67.591,53.42 ccw(c67.556,53.354) 67.591,53.42 ; 67.591,53.42 cw(c67.556,53.354) 67.603,53.412 ; 67.591,53.42 67.591,53.42 ; 67.591,53.42 67.591,53.42 ; 67.603,0.103 67.755,0.227 ; 67.603,53.412 67.755,53.287 ; 67.755,0.227 ccw(c67.707,0.285) 67.765,0.238 ; 67.755,0.227 ccw(c67.707,0.285) 67.765,0.238 ; 67.755,53.287 cw(c67.707,53.229) 67.765,53.277 ; 67.755,53.287 cw(c67.707,53.229) 67.765,53.277 ; 67.765,0.238 67.889,0.389 ; 67.765,53.277 67.889,53.125 ; 67.889,0.389 ccw(c67.831,0.437) 67.898,0.401 ; 67.889,0.389 ccw(c67.831,0.437) 67.898,0.401 ; 67.889,53.125 cw(c67.831,53.078) 67.898,53.113 ; 67.889,53.125 cw(c67.831,53.078) 67.898,53.113 ; 67.898,0.401 67.99,0.574 ; 67.898,53.113 67.99,52.94 ; 67.99,0.574 ccw(c67.924,0.61) 67.996,0.588 ; 67.99,0.574 ccw(c67.924,0.61) 67.996,0.588 ; 67.99,52.94 cw(c67.924,52.905) 67.996,52.927 ; 67.99,52.94 cw(c67.924,52.905) 67.996,52.927 ; 67.996,0.588 ccw(c67.924,0.61) 67.996,0.588 ; 67.996,0.588 68.052,0.775 ; 67.996,0.588 67.996,0.588 ; 67.996,0.588 67.996,0.588 ; 67.996,52.927 ccw(c67.924,52.905) 67.996,52.927 ; 67.996,52.927 67.996,52.927 ; 67.996,52.927 68.052,52.739 ; 67.996,52.927 67.996,52.927 ; 68.052,0.775 ccw(c67.981,0.797) 68.053,0.776 ; 68.052,0.775 68.053,0.775 ; 68.053,0.775 ccw(c67.981,0.797) 68.055,0.79 ; 68.053,0.776 ccw(c67.981,0.797) 68.055,0.79 ; 68.053,0.775 68.053,0.776 ; 68.053,52.739 cw(c67.981,52.717) 68.055,52.725 ; 68.053,52.739 ccw(c67.981,52.717) 68.052,52.739 ; 68.053,52.739 cw(c67.981,52.717) 68.055,52.725 ; 68.052,52.739 68.053,52.739 ; 68.053,52.739 68.053,52.739 ; 68.055,0.79 68.075,0.985 ; 68.055,52.725 68.075,52.53 ; 68.075,0.985 ccw(c68,0.992) 68.075,0.992 ; 68.075,0.985 ccw(c68,0.992) 68.075,0.992 ; 68.075,0.992 68.075,52.522 ; 68.075,52.522 ccw(c68,52.522) 68.075,52.53 ; 68.075,52.522 ccw(c68,52.522) 68.075,52.53

## Silkscreen, mask and mechanical layers (free items; w line width, h text height)
Top Overlay:
  drawing of 21 lines, arcs and shapes, not listed
  text "RST" at 7.55,51.545 h0.8 r270
  text "12V" at 12.576,44.057 h1.5 r270
  text "TEMP" at 12.56,36.146 h1.5 r270
  text "GND" at 22.4,31.7 h0.6 r270
  text "VCC" at 28.807,31.617 h0.6 r270
  text "SCK" at 22.3,28.893 h0.6 r270
  text "DA" at 28.807,28.515 h0.6 r270
  text "DC" at 22.3,26.214 h0.6 r270
  text "CS" at 28.807,26.131 h0.6 r270
  text "SCALE" at 12.635,25.674 h1.5 r270
  text "BL" at 22.3,23.7 h0.6 r270
  text "RS" at 28.807,23.617 h0.6 r270
  text "GND" at 8.995,13.56 h0.7 r180
  text "BTN" at 65.05,13.475 h0.8
  text "I2C" at 12.685,13.41 h1.5 r270
  text "3V3" at 8.995,12.443 h0.7 r180
  text "SDA" at 8.995,11.3 h0.7 r180
  text "SCL" at 8.995,10.087 h0.7 r180
  text "ver 1.2" at 17.946,0.995 h0.7

## Text inside footprints (layer, text, board x,y; h text height)
CN6: Bottom Overlay "5" at 38.462,4.38 h0.7 r90; Bottom Overlay "4" at 35.922,4.38 h0.7 r90; Bottom Overlay "1" at 28.302,4.126 h0.7 r90; Bottom Overlay "2" at 30.842,4.38 h0.7 r90; Bottom Overlay "3" at 33.382,4.38 h0.7 r90; Bottom Overlay "8" at 46.082,4.38 h0.7 r90; Bottom Overlay "7" at 43.542,4.38 h0.7 r90; Bottom Overlay "6" at 41.002,4.38 h0.7 r90
CN8: Bottom Overlay "5" at 61.3,5.032 h0.7 r90; Bottom Overlay "4" at 58.8,5.032 h0.7 r90; Bottom Overlay "1" at 51.3,5.032 h0.7 r90; Bottom Overlay "2" at 53.8,5.032 h0.7 r90; Bottom Overlay "3" at 56.3,5.032 h0.7 r90; Bottom Overlay "6" at 63.8,5.032 h0.7 r90
CN9: Bottom Overlay "5" at 56.242,52.64 h0.7 r90; Bottom Overlay "4" at 53.702,52.64 h0.7 r90; Bottom Overlay "1" at 46.082,52.386 h0.7 r90; Bottom Overlay "2" at 48.622,52.64 h0.7 r90; Bottom Overlay "3" at 51.162,52.64 h0.7 r90; Bottom Overlay "8" at 63.862,52.64 h0.7 r90; Bottom Overlay "7" at 61.322,52.64 h0.7 r90; Bottom Overlay "6" at 58.782,52.64 h0.7 r90
D1: Top Overlay "+" at 65.291,4.329 h0.7 r270
P2: Top Overlay "3V3" at 11.448,19.001 h1.52 r180; Top Overlay "SCK" at 11.448,21.668 h1.52 r180; Top Overlay "DAT" at 11.448,24.399 h1.52 r180; Top Overlay "GND" at 11.448,27.078 h1.52 r180
P3: Top Overlay "GND" at 11.373,31.62 h1.52 r180; Top Overlay "DAT" at 11.373,34.262 h1.52 r180; Top Overlay "3V3" at 11.373,36.853 h1.52 r180
P4: Top Overlay "VIN" at 11.005,41.611 h1.52 r180; Top Overlay "GND" at 11.255,44.146 h1.52 r180